# Altium PCB TPS5420_SMPS.PcbDoc
Units mm, origin at the board's own origin, x right, y up, seen from the top; angles counter-clockwise.
Board outline 44 x 19.22 mm, 2 copper layers (Top Layer, Bottom Layer), stack 1.581 mm thick; 11 components, 7 nets, 32 pads, 23 vias.
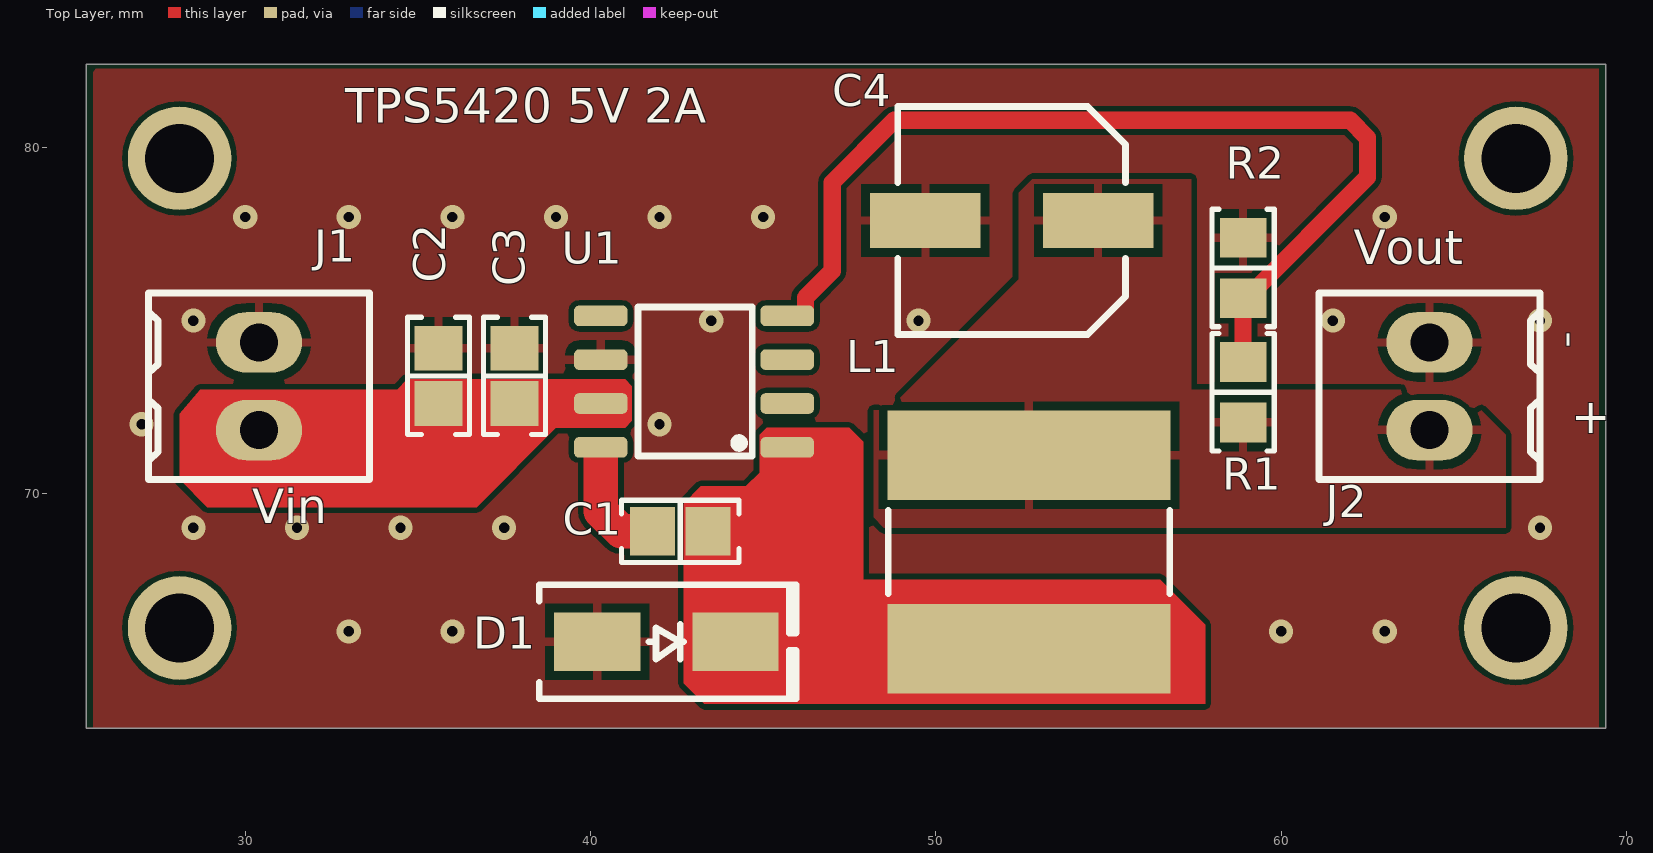
[diagram p0: Top Layer view]
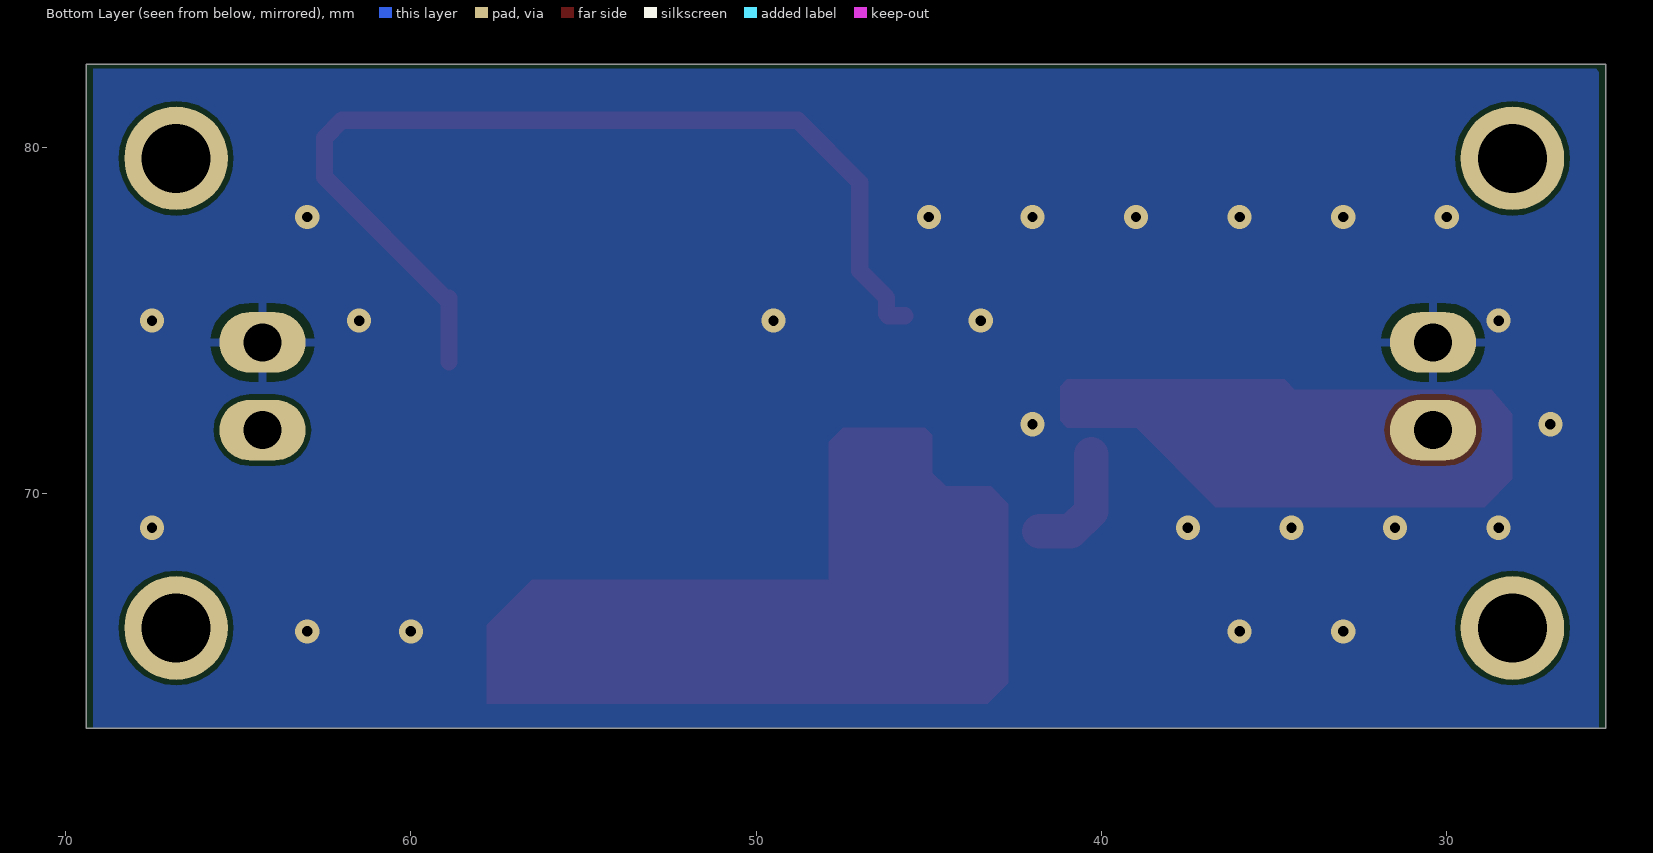
[diagram p1: Bottom Layer view, seen from below]
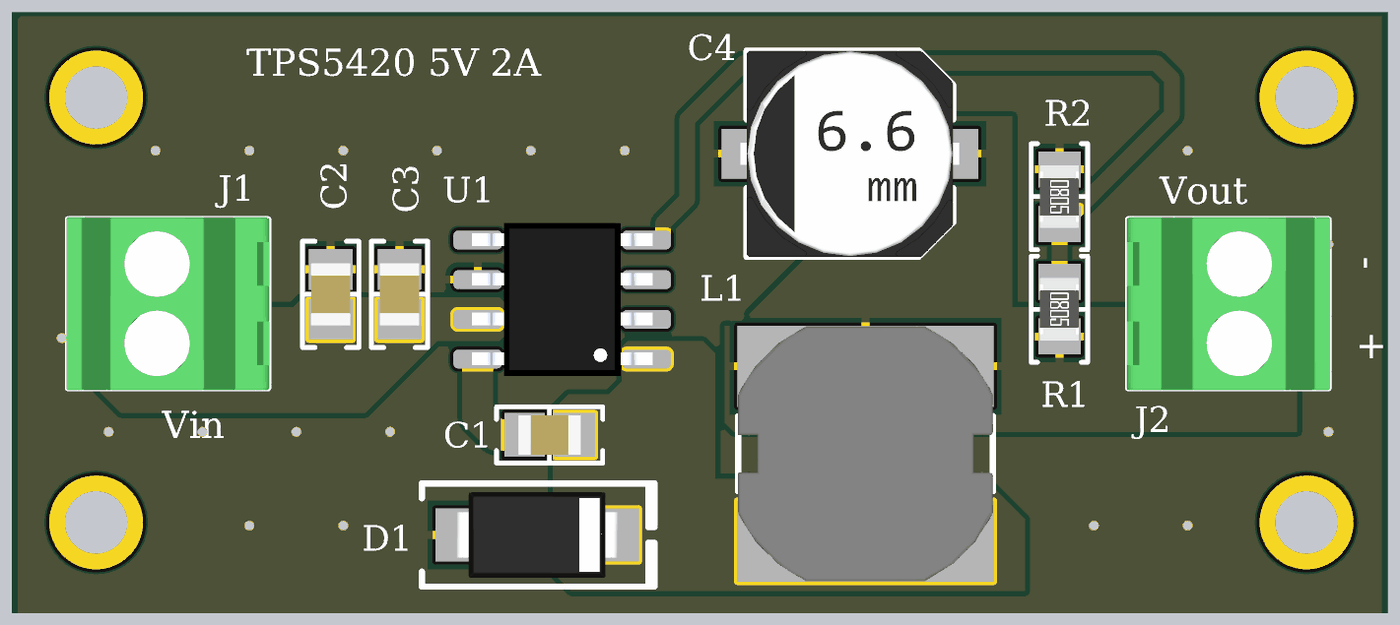
[diagram p2: 3D render of the assembled board from above, using the file's embedded part models]

## Layer stack, top to bottom
Top Solder: solder mask 0.0102, Solder Resist, Dk 3.5
Top Layer: signal copper 0.0356
Dielectric 1: dielectric 1.51, FR-4, Dk 4.8
Bottom Layer: signal copper 0.0356
Bottom Solder: solder mask 0.0102, Solder Resist, Dk 3.5

## Board outline
25.4,63.2 69.4,63.2 69.4,82.423 25.4,82.423

## Design rules (kind name [scope] priority, off if disabled: settings)
Clearance [All] p1: gap=0.152 ignorepadtopadclearanceinfootprint=FALSE
PolygonConnect [All] p1: connectstyle=Relief reliefconductorwidth=0.254 reliefentries=4 polygonreliefangle="90 Angle" airgapwidth=0.254
RoutingVias [All] p1: holewidth=0.711 width=1.27 viastyle="Through Hole" minholewidth=0.1 minwidth=0.127 maxholewidth=0.711 maxwidth=1.27
SolderMaskExpansion [All] p1: expansion=0.102
Width [All] p1: maxlimit=3 minlimit=0.152 preferedwidth=0.3 minimp=50.000000 maximp=50.000000 favimp=50.000000
30 further rules are at their usual default settings.

## Components (designator, comment, footprint, x,y, rotation, side; value= is the part's Value field where it differs from the comment)
C1 "0.011µF" "CAP 0805_2012" 42.6,68.9 r0 top
C2 "4.7µF" "CAP 0805_2012" 35.6,73.4 r270 top
C3 "0.1µF" "CAP 0805_2012" 37.8,73.4 r270 top
C4 "100µF" "CAP ALSMD 6.6MM H6.1MM" 52.2,77.9 r180 top
D1 "B340A-13-F" "DO214AC SMA" 42.2,65.7 r0 top
J1 "282834-2" "TE 282834-2" 30.4,73.1 r90 top
J2 "282834-2" "TE 282834-2" 64.3,73.1 r270 top
L1 "33µH" "BOURNS SRN8040" 52.7,68.3 r90 top
R1 "10 kOhms" "RES 0805_2012" 58.9,72.925 r270 top
R2 "3.24 kOhms" "RES 0805_2012" 58.9,76.525 r270 top
U1 "TPS5420QDRQ1" SO8 45.7,71.33 r180 top

## Footprints (in the part's own frame and the unit in brackets; to place one, negate y for a bottom-side part, rotate by r counter-clockwise, add the part's x,y. Pads: shape width x height; smd on the part's side, far side on the other; paste and mask are expansions set on the pad)
"BOURNS SRN8040" [mm] "Power Inductor, 2-Leads, Bourns, SRN8040-220M"
  rect 2.6x8.2 smd: 1(-2.8,0) 2(2.8,0)
  silkscreen extent -1.2,-4.07 1.2,4.08, body extent -4.08,-4.07 4.07,4.08, height 4
"CAP 0805_2012" [mm] "Chip Capacitor, 2-Leads, Body 2.00x1.20mm, IPC Medium Density"
  rect 1.3x1.4 smd: 1(-0.8,0) 2(0.8,0)
  silkscreen extent -1.7,-0.9 1.7,0.9, body extent -1,-0.64 1,0.64, height 1.26
"CAP ALSMD 6.6MM H6.1MM" [mm] "Aluminum Electrolytic Capacitor, Body 6.60x6.60x6.10mm, IPC Low Density"
  rect 3.2x1.6 smd: 1(-2.5,0) 2(2.5,0)
  silkscreen extent -3.3,-3.3 3.3,3.3, body extent -3.5,-3.3 3.5,3.3, height 6.1
"DO214AC SMA" [mm] "Molded Diode, 2-Leads, Body 4.30x2.60mm, IPC Medium Density"
  rect 2.5x1.7 smd: 1(-2,0) 2(2,0)
  silkscreen extent -3.68,-1.65 3.75,1.65, body extent -2.6,-1.37 2.6,1.37, height 2.4
"RES 0805_2012" [mm] "Chip Resistor, 2-Leads, Body 2.00x1.25mm, IPC Medium Density"
  rect 1.15x1.35 smd: 1(-0.875,0) 2(0.875,0)
  silkscreen extent -1.7,-0.9 1.7,0.9, body extent -1,-0.62 1,0.63, height 0.6
SO8 [mm]
  rrect50% 1.55x0.6 smd mask+0.1: 1(0,0) 2(0,-1.27) 3(0,-2.54) 4(0,-3.81) 5(5.4,-3.81) 6(5.4,-2.54) 7(5.4,-1.27) 8(5.4,0)
  silkscreen extent 1.02,-4.06 4.32,0.25, body extent -0.19,-4.36 5.59,0.55, height 1.45
"TE 282834-2" [mm]
  oval 1.75x2.5 hole 1.1: 1(-1.27,0) 2(1.27,0)
  silkscreen extent -2.7,-3.2 2.7,3.2, body extent -2.77,-3.25 2.77,3.25, height 10

## Part data
C1: library part GRM2195C1H113JA01D, "CAP CER 0.011UF 50V C0G/NP0 0805", Device Package="0805 (2012 Metric)", Manufacturer="Murata Electronics", Operating Temperature="-55°C ~ 125°C", Supplier Part Number 1=490-8297-1-ND, Temperature Coefficient="C0G, NP0", Tolerance=±5%, Voltage - Rated=50V, Applications="General Purpose", Capacitance=0.011µF, ComponentLink1Description=Datasheet, ComponentLink1URL=https://www.murata.com/~/media/webrenewal/support/library/catalog/products/capacitor/mlcc/c02e.ashx?la=en-us, ComponentLink2Description="DigiKey Link", ComponentLink2URL=http://digikey.com/product-detail/en/murata-electronics/GRM2195C1H113JA01D/490-8297-1-ND/4380591, LastUpdated="2.09.2020 01:04:18", Lifecycle Status=Active, Minimum Order=1, Mounting Type="Surface Mount, MLCC", Package / Case="0805 (2012 Metric)", Packaging=TapeAndReel, PartId=14729, Part Number=GRM2195C1H113JA01D, Part Status=Active, Price=0.09, Series=GRM, Size / Dimension="0.079\" L x 0.049\" W (2.00mm x 1.25mm)", Supplier 1=DigiKey, Thickness (Max)="0.037\" (0.95mm)"
C2: library part C2012X5R1V475K125AC, "CAP CER 4.7UF 35V X5R 0805", Device Package="0805 (2012 Metric)", Manufacturer="TDK Corporation", Operating Temperature="-55°C ~ 85°C", Supplier Part Number 1=445-14431-1-ND, Temperature Coefficient=X5R, Tolerance=±10%, Voltage - Rated=35V, Applications="General Purpose", Capacitance=4.7µF, ComponentLink1Description=Datasheet, ComponentLink1URL=https://product.tdk.com/info/en/catalog/datasheets/mlcc_commercial_general_en.pdf?ref_disty=digikey, ComponentLink2Description="DigiKey Link", ComponentLink2URL=http://digikey.com/product-detail/en/tdk-corporation/C2012X5R1V475K125AC/445-14431-1-ND/3956097, Features="Low ESL", LastUpdated="2.09.2020 01:04:40", Lifecycle Status=Active, Minimum Order=1, Mounting Type="Surface Mount, MLCC", Package / Case="0805 (2012 Metric)", Packaging=TapeAndReel, PartId=3368, Part Number=C2012X5R1V475K125AC, Part Status=Active, Price=0.11, Series=C, Size / Dimension="0.079\" L x 0.049\" W (2.00mm x 1.25mm)", Supplier 1=DigiKey, Thickness (Max)="0.057\" (1.45mm)"
C3: library part C0805C104M5RACAUTO, "CAP CER 0.1UF 50V X7R 0805", Device Package="0805 (2012 Metric)", Manufacturer=KEMET, Operating Temperature="-55°C ~ 125°C", Ratings=AEC-Q200, Supplier Part Number 1=399-12977-1-ND, Temperature Coefficient=X7R, Tolerance=±20%, Voltage - Rated=50V, Applications="Automotive, Bypass, Decoupling", Capacitance=0.1µF, ComponentLink1Description=Datasheet, ComponentLink1URL=https://api.kemet.com/component-edge/download/datasheet/C0805C104M5RACAUTO.pdf, ComponentLink2Description="DigiKey Link", ComponentLink2URL=http://digikey.com/product-detail/en/kemet/C0805C104M5RACAUTO/399-12977-1-ND/5762259, LastUpdated="2.09.2020 01:04:42", Lifecycle Status=Active, Minimum Order=1, Mounting Type="Surface Mount, MLCC", Package / Case="0805 (2012 Metric)", Packaging=TapeAndReel, PartId=2568, Part Number=C0805C104M5RACAUTO, Part Status=Active, Price=0.02, Series="SMD Auto X7R", Size / Dimension="0.079\" L x 0.049\" W (2.00mm x 1.25mm)", Supplier 1=DigiKey, Thickness (Max)="0.035\" (0.88mm)"
C4: library part 107SML016M, "CAP ALUM 100UF 20% 16V SMD", Device Package="Radial, Can - SMD", ESR (Equivalent Series Resistance)="3.316Ohm @ 120Hz", Lifetime @ Temp.="2000 Hrs @ 85°C", Manufacturer="Illinois Capacitor", Operating Temperature="-40°C ~ 85°C", Ripple Current @ High Frequency="154.5mA @ 100kHz", Ripple Current @ Low Frequency="103mA @ 120Hz", Supplier Part Number 1=1572-1307-1-ND, Tolerance=±20%, Voltage - Rated=16V, Applications="General Purpose", Capacitance=100µF, ComponentLink1Description=Datasheet, ComponentLink1URL=http://www.illinoiscapacitor.com/pdf/seriesDocuments/SML%20series.pdf, ComponentLink2Description="DigiKey Link", ComponentLink2URL=http://digikey.com/product-detail/en/illinois-capacitor/107SML016M/1572-1307-1-ND/5974066, Height - Seated (Max)="0.217\" (5.50mm)", LastUpdated="2.09.2020 01:18:40", Lifecycle Status=Active, Minimum Order=1, Mounting Type="Surface Mount", Package / Case="Radial, Can - SMD", Packaging=TapeAndReel, PartId=9069, Part Number=107SML016M, Part Status=Active, Polarization=Polar, Price=0.09, Series=SML, Size / Dimension="0.248\" Dia (6.30mm)", Supplier 1=DigiKey, Surface Mount Land Size="0.260\" L x 0.260\" W (6.60mm x 6.60mm)"
D1: "DIODE SCHOTTKY 40V 3A SMA", Capacitance @ Vr, F="200pF @ 4V, 1MHz", Current - Average Rectified (Io)=3A, Current - Reverse Leakage @ Vr="500µA @ 40V", Manufacturer="Diodes Incorporated", Operating Temperature - Junction="-55°C ~ 150°C", Package / Case="DO-214AC, SMA", Supplier Device Package=SMA, Supplier Part Number 1=B340A-FDICT-ND, Voltage - DC Reverse (Vr) (Max)=40V, Voltage - Forward (Vf) (Max) @ If="500mV @ 3A", ComponentLink1Description=Datasheet, ComponentLink1URL=https://www.diodes.com/assets/Datasheets/ds30891.pdf, ComponentLink2Description="DigiKey Link", ComponentLink2URL=http://digikey.com/product-detail/en/diodes-incorporated/B340A-13-F/B340A-FDICT-ND/725054, Diode Type=Schottky, LastUpdated="2.09.2020 01:19:04", Lifecycle Status=Active, Minimum Order=1, Mounting Type="Surface Mount", Packaging=TapeAndReel, PartId=1873, Part Number=B340A-13-F, Part Status=Active, Price=0.11, Series="Automotive, AEC-Q101", Speed="Fast Recovery =< 500ns, > 200mA (Io)", Supplier 1=DigiKey
J1 J2: "TERM BLK 2P SIDE ENT 2.54MM PCB", Color=Green, Current=10A, Manufacturer="TE Connectivity AMP Connectors", Supplier Part Number 1=A98333-ND, Voltage=150V, ComponentLink1Description=Datasheet, ComponentLink1URL=https://www.te.com/commerce/DocumentDelivery/DDEController?Action=srchrtrv&DocNm=282834&DocType=Customer+Drawing&DocLang=English, ComponentLink2Description="DigiKey Link", ComponentLink2URL=http://digikey.com/product-detail/en/te-connectivity-amp-connectors/282834-2/A98333-ND/1150135, LastUpdated="15.01.2020 04:15:38", Lifecycle Status=Active, Mating Orientation="Horizontal with Board", Minimum Order=1, Mounting Type="Through Hole", Number of Levels=1, Packaging=Bulk, Part Number=282834-2, Part Status=Active, Pitch="0.100\" (2.54mm)", Positions Per Level=2, Price=0.88, Series=Buchanan, Supplier 1=DigiKey, Wire Gauge="16-30 AWG", Wire Termination="Screw - Rising Cage Clamp"
L1: library part SRN8040-330M, "FIXED IND 33UH 1.7A 145 MOHM SMD", Current - Saturation=1.9A, Current Rating (Amps)=1.7A, DC Resistance (DCR)="145mOhm Max", Device Package=Nonstandard, Frequency - Self Resonant=10MHz, Inductance Frequency - Test=100kHz, Manufacturer="Bourns Inc.", Operating Temperature="-40°C ~ 125°C", Q @ Freq="20 @ 2.52MHz", Supplier Part Number 1=SRN8040-330MCT-ND, Tolerance=±20%, ComponentLink1Description=Datasheet, ComponentLink1URL=https://www.bourns.com/docs/Product-Datasheets/SRN8040.pdf, ComponentLink2Description="DigiKey Link", ComponentLink2URL=http://digikey.com/product-detail/en/bourns-inc/SRN8040-330M/SRN8040-330MCT-ND/2756183, Height - Seated (Max)="0.157\" (4.00mm)", Inductance=33µH, LastUpdated="2.09.2020 01:30:21", Lifecycle Status=Active, Material - Core=Ferrite, Minimum Order=1, Mounting Type="Surface Mount", Package / Case=Nonstandard, Packaging=TapeAndReel, PartId=3620, Part Number=SRN8040-330M, Part Status=Active, Price=0.27, Series=SRN8040, Shielding=Semi-Shielded, Size / Dimension="0.315\" L x 0.315\" W (8.00mm x 8.00mm)", Supplier 1=DigiKey, Type=Wirewound
R1: library part ERA-6AEB103V, "RES 10K OHM 0.1% 1/8W 0805", Device Package="0805 (2012 Metric)", Manufacturer="Panasonic Electronic Components", Operating Temperature="-55°C ~ 155°C", Power (Watts)="0.125W, 1/8W", Ratings=AEC-Q200, Supplier Device Package=0805, Supplier Part Number 1=P10KDACT-ND, Temperature Coefficient=±25ppm/°C, Tolerance=±0.1%, ComponentLink1Description=Datasheet, ComponentLink1URL=https://industrial.panasonic.com/cdbs/www-data/pdf/RDM0000/AOA0000C307.pdf, ComponentLink2Description="DigiKey Link", ComponentLink2URL=http://digikey.com/product-detail/en/panasonic-electronic-components/ERA-6AEB103V/P10KDACT-ND/1465971, Composition="Thin Film", Features="Automotive AEC-Q200", Height - Seated (Max)="0.024\" (0.60mm)", LastUpdated="2.09.2020 01:15:23", Lifecycle Status=Active, Minimum Order=1, Number of Terminations=2, Package / Case="0805 (2012 Metric)", Packaging=TapeAndReel, PartId=28062, Part Number=ERA-6AEB103V, Part Status=Active, Price=0.04, Resistance="10 kOhms", Series=ERA-6A, Size / Dimension="0.079\" L x 0.049\" W (2.00mm x 1.25mm)", Supplier 1=DigiKey
R2: library part TNPW08053K24BEEA, "RES 3.24K OHM 0.1% 1/8W 0805", Device Package="0805 (2012 Metric)", Manufacturer="Vishay Dale", Operating Temperature="-55°C ~ 155°C", Power (Watts)="0.2W, 1/5W", Ratings=AEC-Q200, Supplier Device Package=0805, Supplier Part Number 1=541-3212-1-ND, Temperature Coefficient=±25ppm/°C, Tolerance=±0.1%, ComponentLink1Description=Datasheet, ComponentLink1URL=http://www.vishay.com/docs/28758/tnpw_e3.pdf, ComponentLink2Description="DigiKey Link", ComponentLink2URL=http://digikey.com/product-detail/en/vishay-dale/TNPW08053K24BEEA/541-3212-1-ND/6532854, Composition="Thin Film", Features="Anti-Sulfur, Automotive AEC-Q200, Moisture Resistant", Height - Seated (Max)="0.022\" (0.55mm)", LastUpdated="2.09.2020 01:15:02", Lifecycle Status=Active, Minimum Order=1, Number of Terminations=2, Package / Case="0805 (2012 Metric)", Packaging=TapeAndReel, PartId=37827, Part Number=TNPW08053K24BEEA, Part Status=Active, Price=0.18, Resistance="3.24 kOhms", Series="TNPW e3", Size / Dimension="0.079\" L x 0.049\" W (2.00mm x 1.25mm)", Supplier 1=DigiKey
U1: "IC REG BUCK ADJUSTABLE 2A 8SOIC", Digi-Key Part Number=296-23226-6-ND, Manufacturer="Texas Instruments", Manufacturer Product Number=TPS5420QDRQ1, Supplier Link=https://www.digikey.com/en/products/detail/texas-instruments/TPS5420QDRQ1/1830706

## Free pads (board coordinates)
  round 3 hole 2 mask+0.1: ""(28.1,66.1) ""(28.1,79.7) ""(66.8,66.1) ""(66.8,79.7)

## Via types
v1: diameter 0.7, hole 0.3, Top Layer to Bottom Layer, tented both sides, 23 vias

## Nets (pads, with @x,y where several pads share a name; then routed paths per layer and width w, separated by ;. In a path a pad name is that pad's centre, name@x,y a point inside that pad or via, vN(x,y) a via of type N, cw(c..) or ccw(c..) an arc to the next point about the centre after c; other vN are vias at no path point)
+5: C4.1 J2.2 L1.2 R1.2
ENA: U1.5
GND: C2.1 C3.1 C4.2 D1.1 J1.2 J2.1 R2.1 U1.6
  other v1: 33,66 36,66 60,66 63,66 28.5,69 31.5,69 34.5,69 37.5,69 67.5,69 27,72 42,72 28.5,75 43.5,75 49.5,75 61.5,75 67.5,75 30,78 33,78 36,78 39,78 42,78 45,78 63,78
NetC1_1: C1.1 U1.8 | length 3.4
  Top Layer w1: U1.8@40.3,71.13 40.3,69.486 40.886,68.9 C1.1
NetC1_2: C1.2 D1.2 L1.1 U1.1
NetC2_2: C2.2 C3.2 J1.1 U1.7
NetR1_1: R1.1 R2.2 U1.4 | length 29.2
  Top Layer w0.5: U1.4 46.175,75.14 46.225,75.19 46.225,75.665 47,76.44 47,79 48.8,80.8 62,80.8 62.5,80.3 62.5,79.15 59,75.65 R2.2 R1.1
pads on no net: U1.2 U1.3

## Polygon pours and split planes (outlines as drawn)
GND on Top Layer "GND_L01_P010" (solid, pour order 10): 25.5,82.4 25.6,82.3 69.2,82.3 69.2,63.2 25.6,63.2 25.6,82.2 25.5,82.3
+5 on Top Layer "NONET_L-01_P-001" (solid, pour order 8): 52.8,79.1 57.4,79.1 57.4,73 65.2,73 66.5,71.7 66.5,69 48.5,69 48.2,69.3 48.2,72.4 48.6,72.4 52.4,76.2 52.4,78.7
GND on Bottom Layer "GND_L02_P012" (solid, pour order 12): 25.5,82.4 25.6,82.3 69.2,82.3 69.2,63.2 25.6,63.2 25.6,82.2 25.5,82.3

## Other copper
Top Layer:
  region net NetC1_2: 57.8,63.9 43.3,63.9 42.7,64.5 42.7,69.7 43.2,70.2 44.5,70.2 44.9,70.6 44.9,71.7 45.1,71.9 47.5,71.9 47.9,71.5 47.9,67.5 56.5,67.5 57.8,66.2
  region net NetC2_2: 28.7,73 34.4,73 34.7,73.3 41,73.3 41.2,73.1 41.2,72.1 41,71.9 39,71.9 36.7,69.6 28.9,69.6 28.1,70.4 28.1,72.3

## Silkscreen, mask and mechanical layers (free items; w line width, h text height)
Top Overlay:
  text "TPS5420 5V 2A" at 32.9,80.4 h1.7
  text "Vout" at 62.1,76.3 h1.7
  text "-" at 69,74.2 h1.7 r90
  text "+" at 68.4,71.4 h1.7
  text "Vin" at 30.2,68.8 h1.7